# Altium PCB hic v1.0.0.PcbDoc (part 1 of 2)
Units mm, origin at the board's own origin, x right, y up, seen from the top; angles counter-clockwise.
Board outline 54.61 x 86.36 mm, 4 copper layers (Top Layer, GND, PWR, Bottom Layer); 173 components, 96 nets, 602 pads, 171 vias.
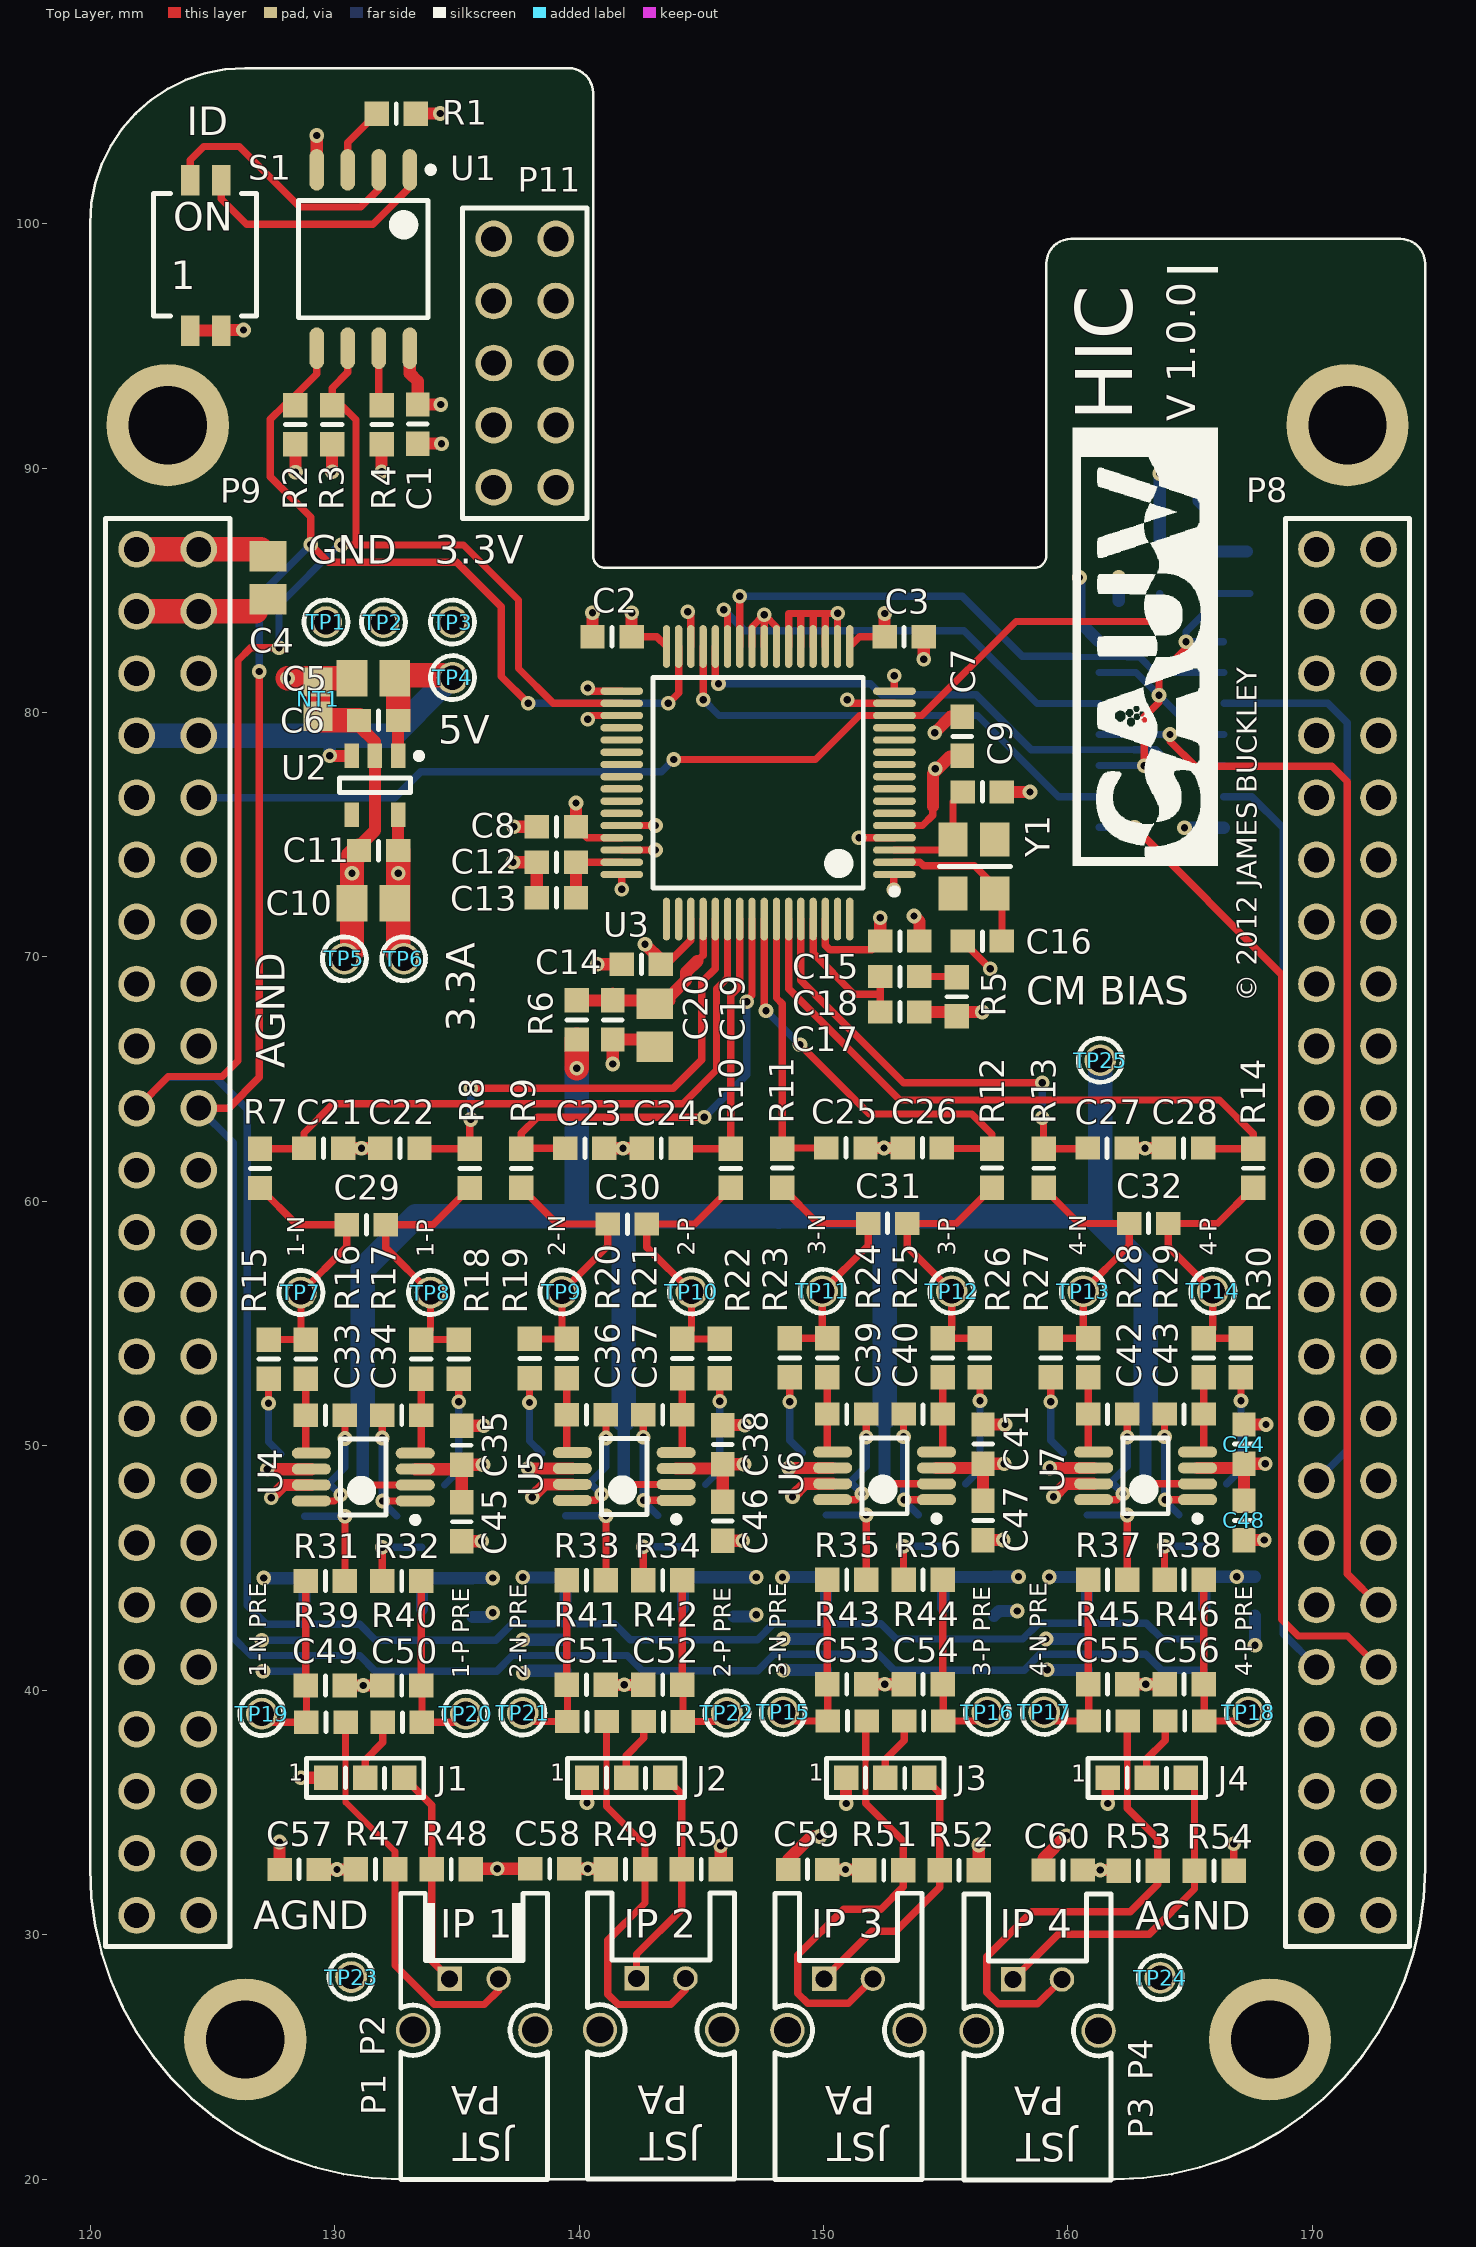
[diagram p0: Top Layer view]
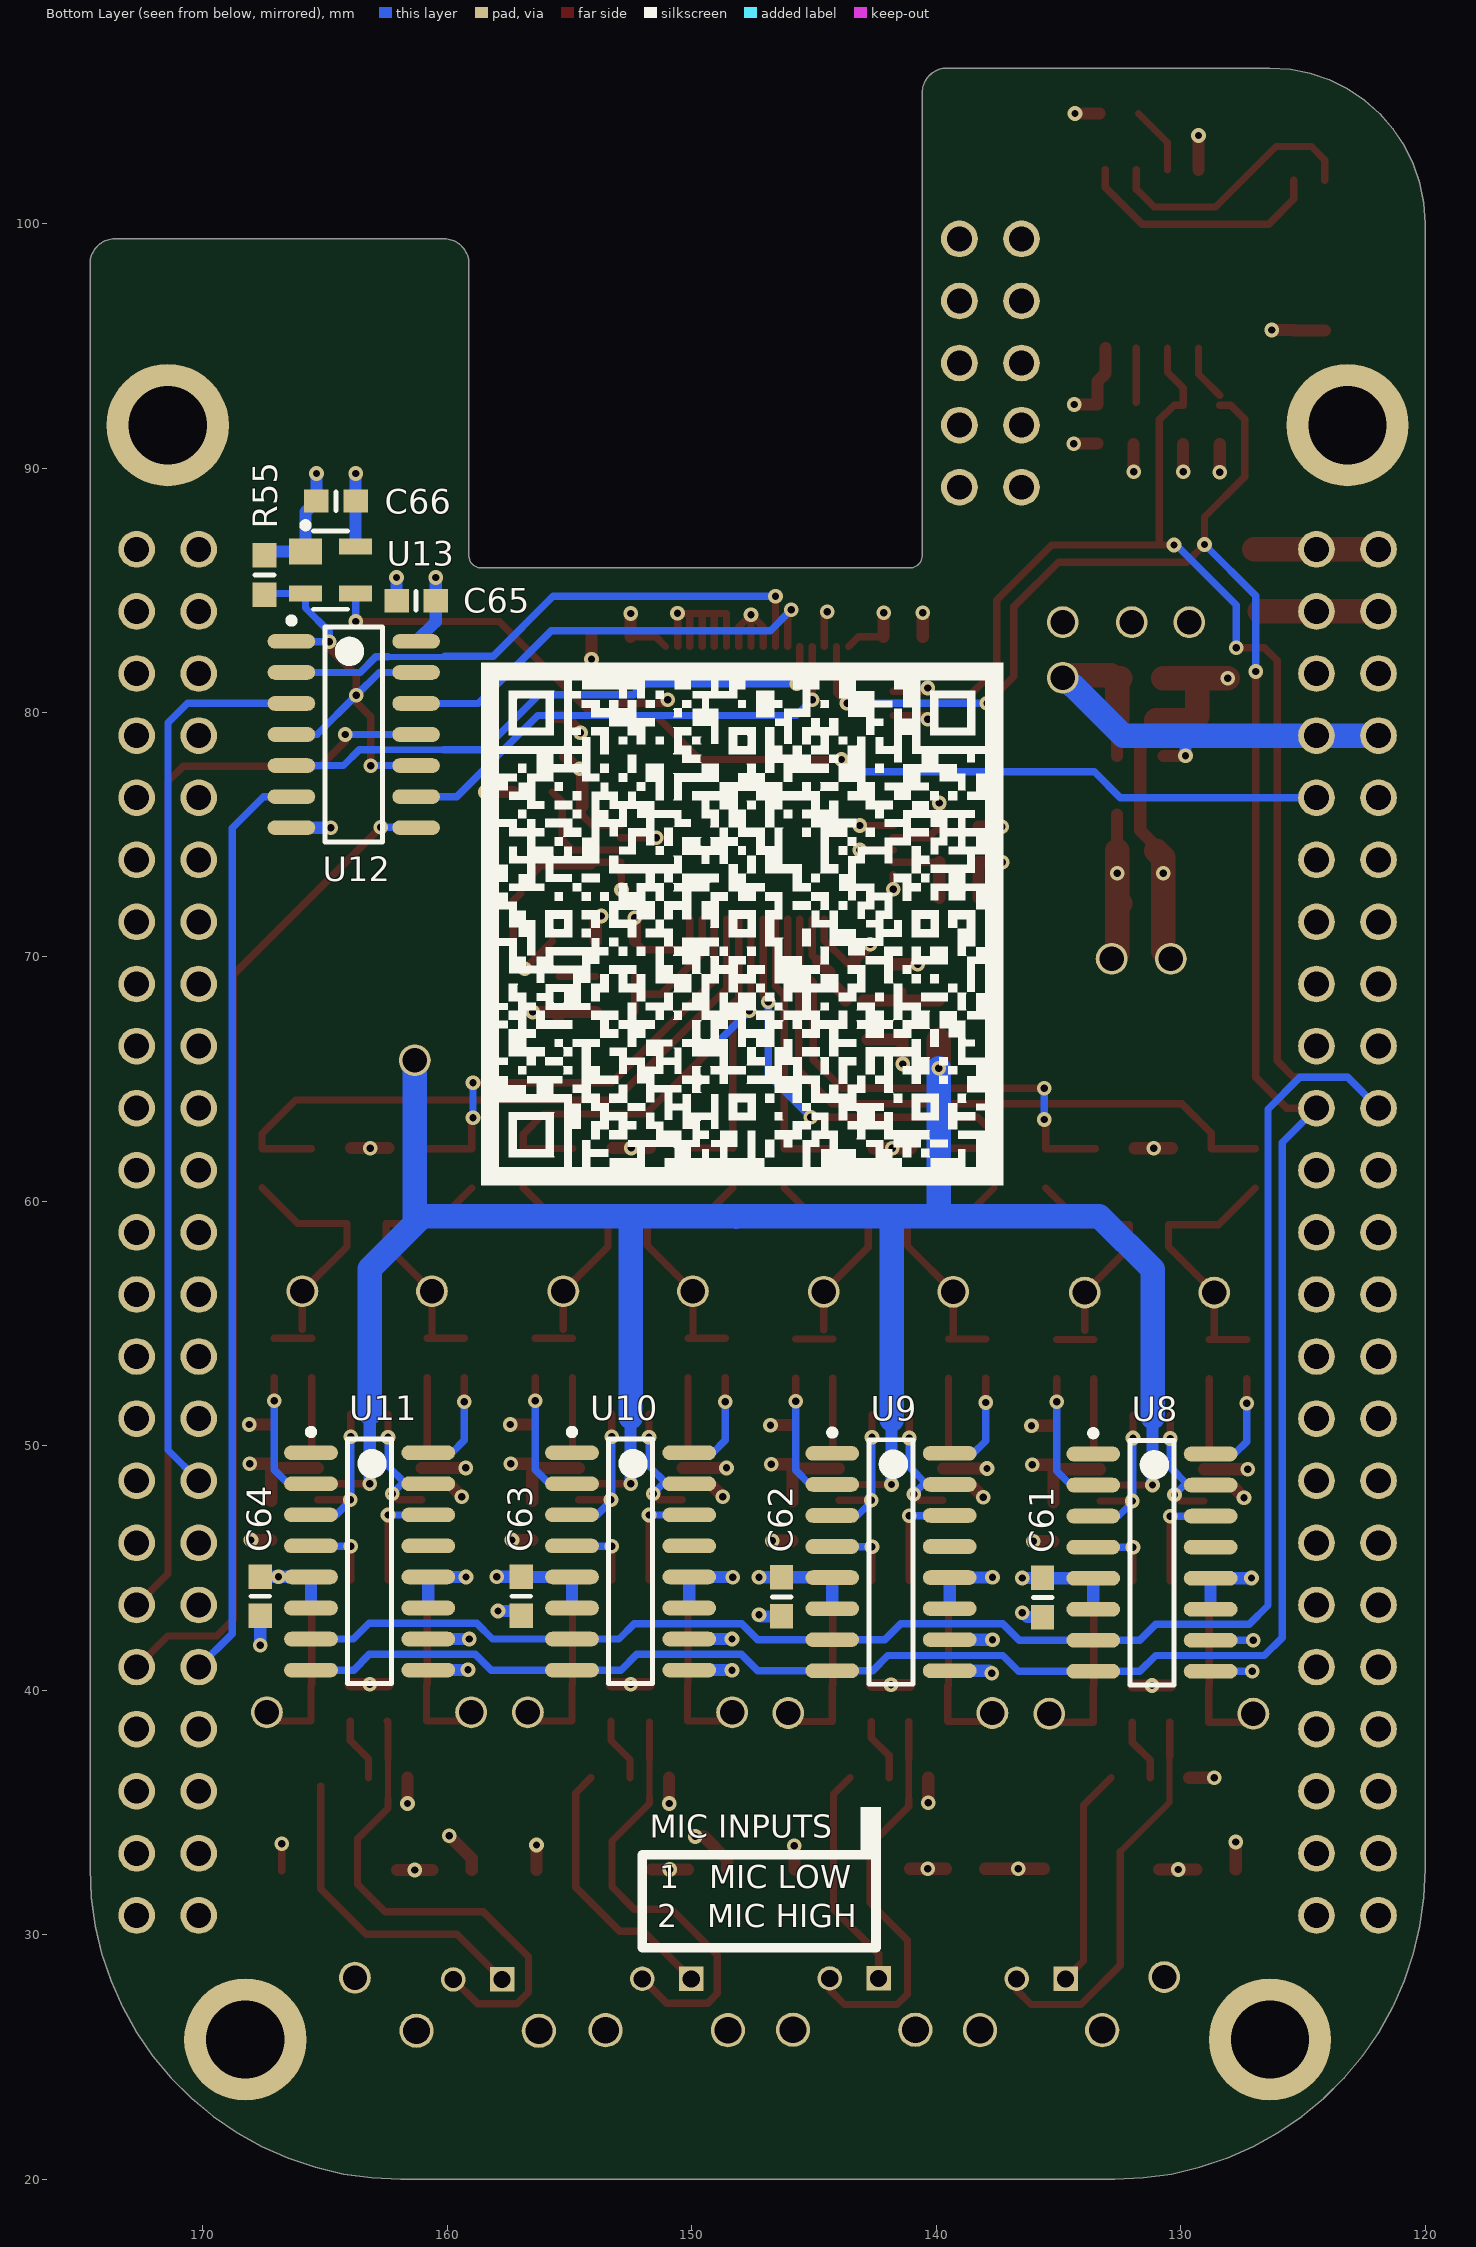
[diagram p1: Bottom Layer view, seen from below]
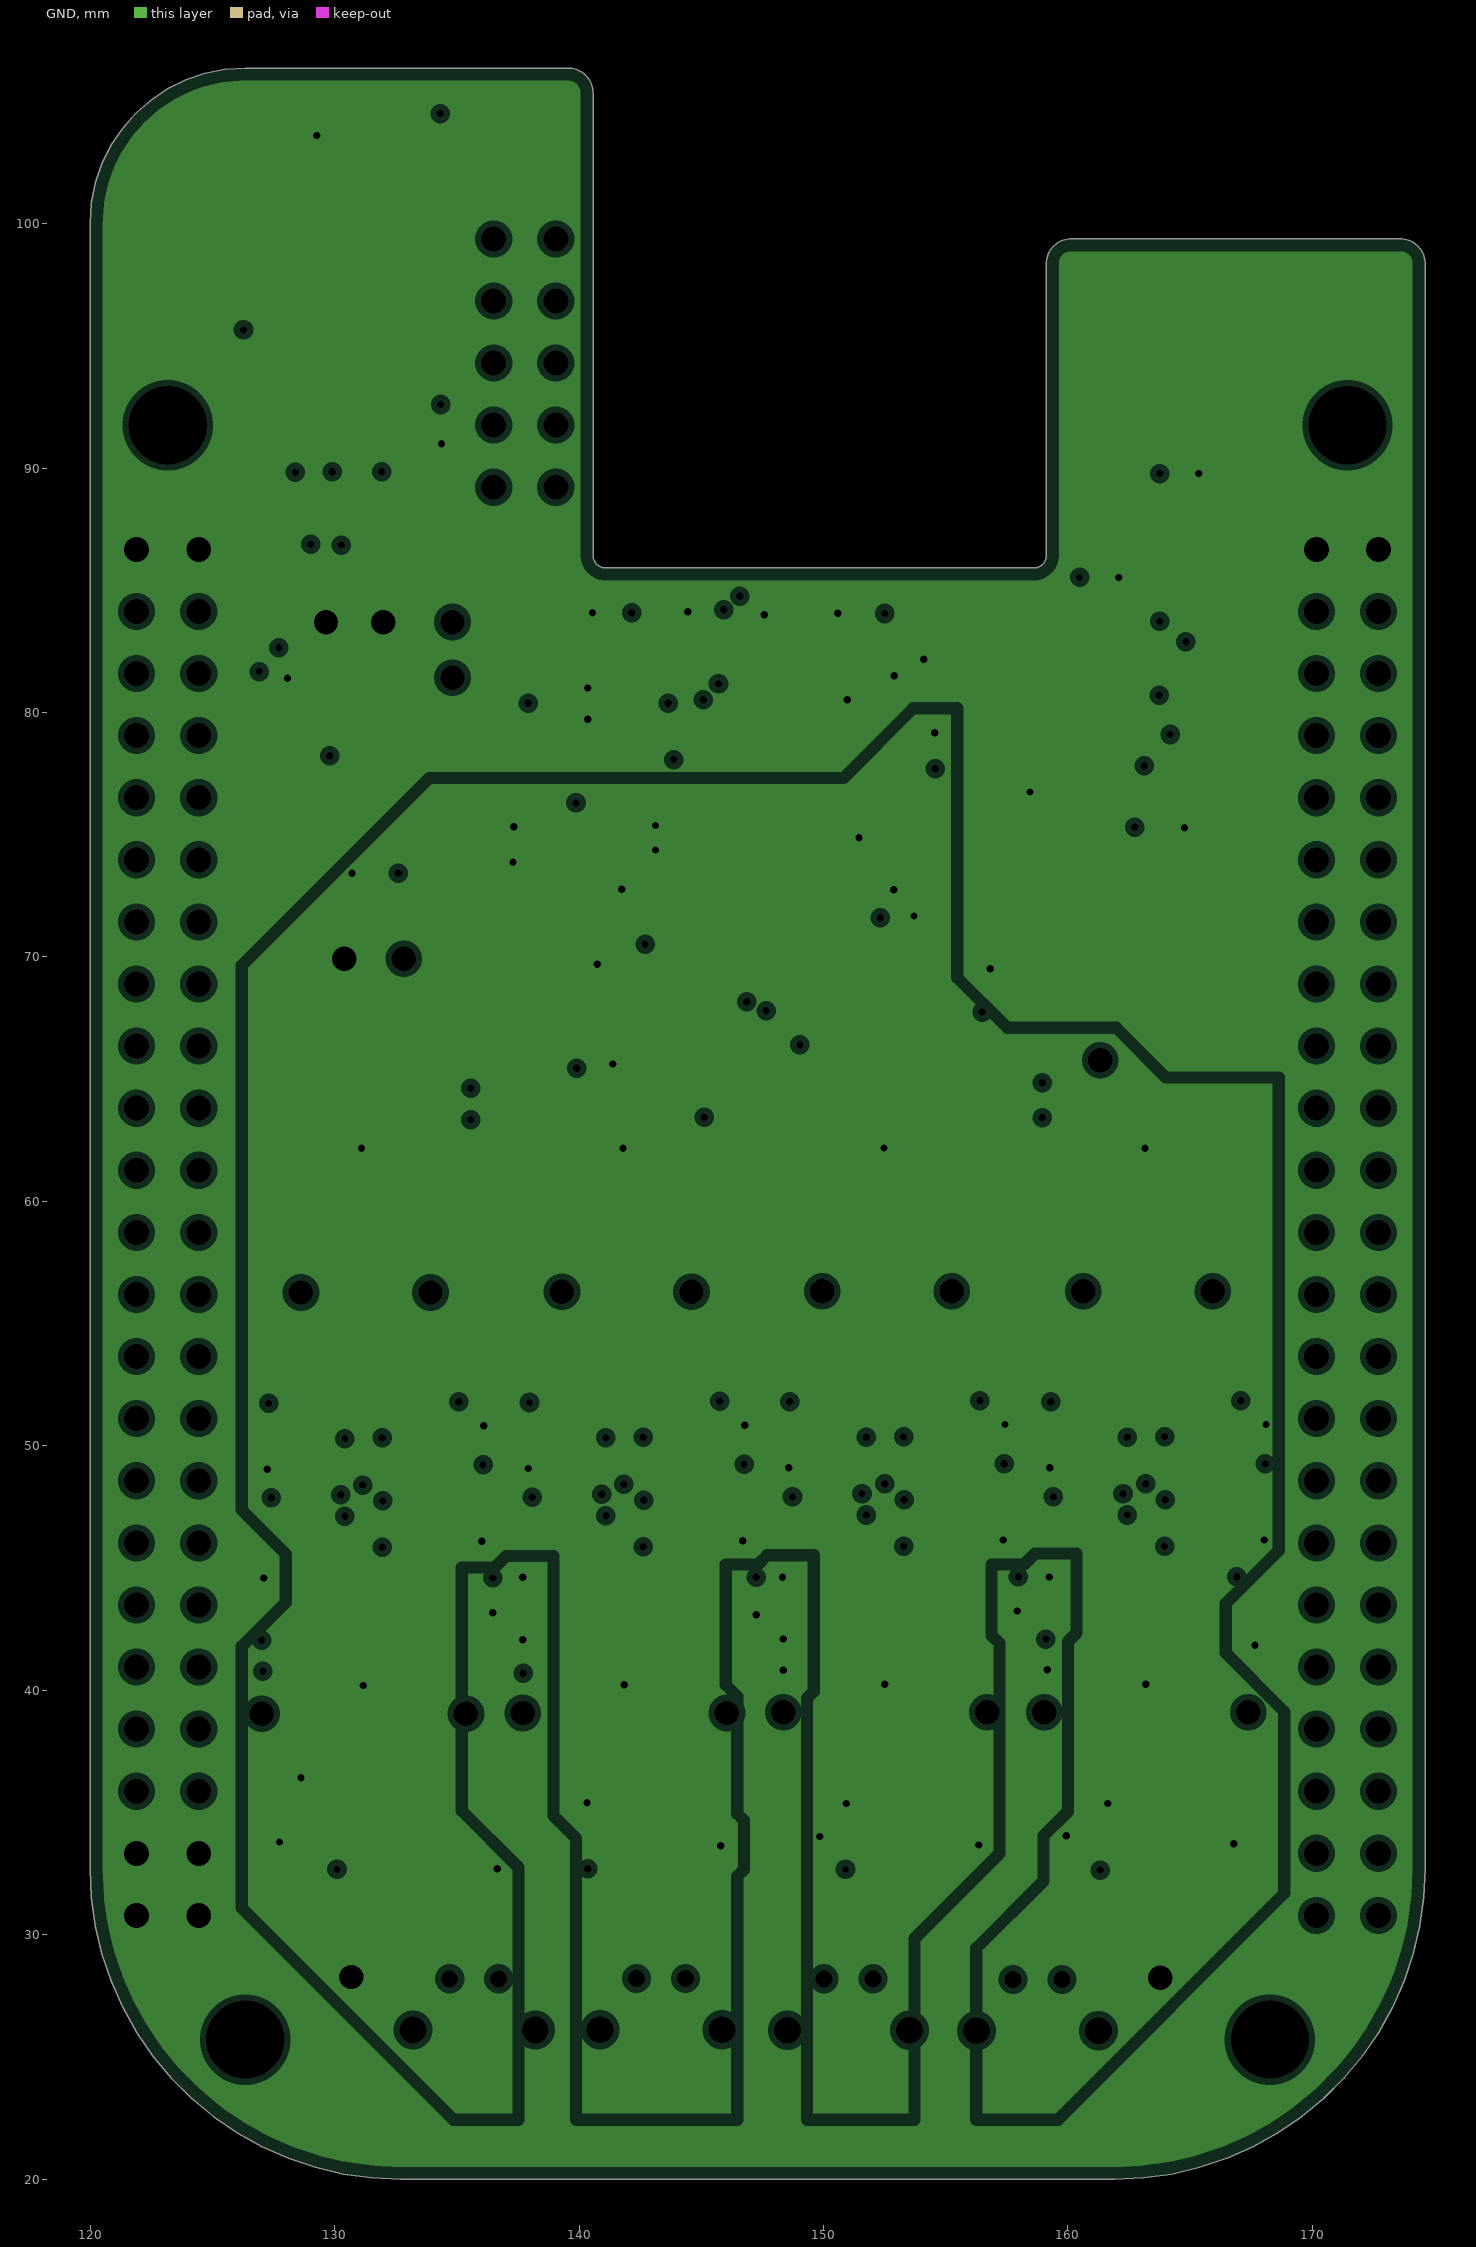
[diagram p2: GND, clearances drawn from the general rule]
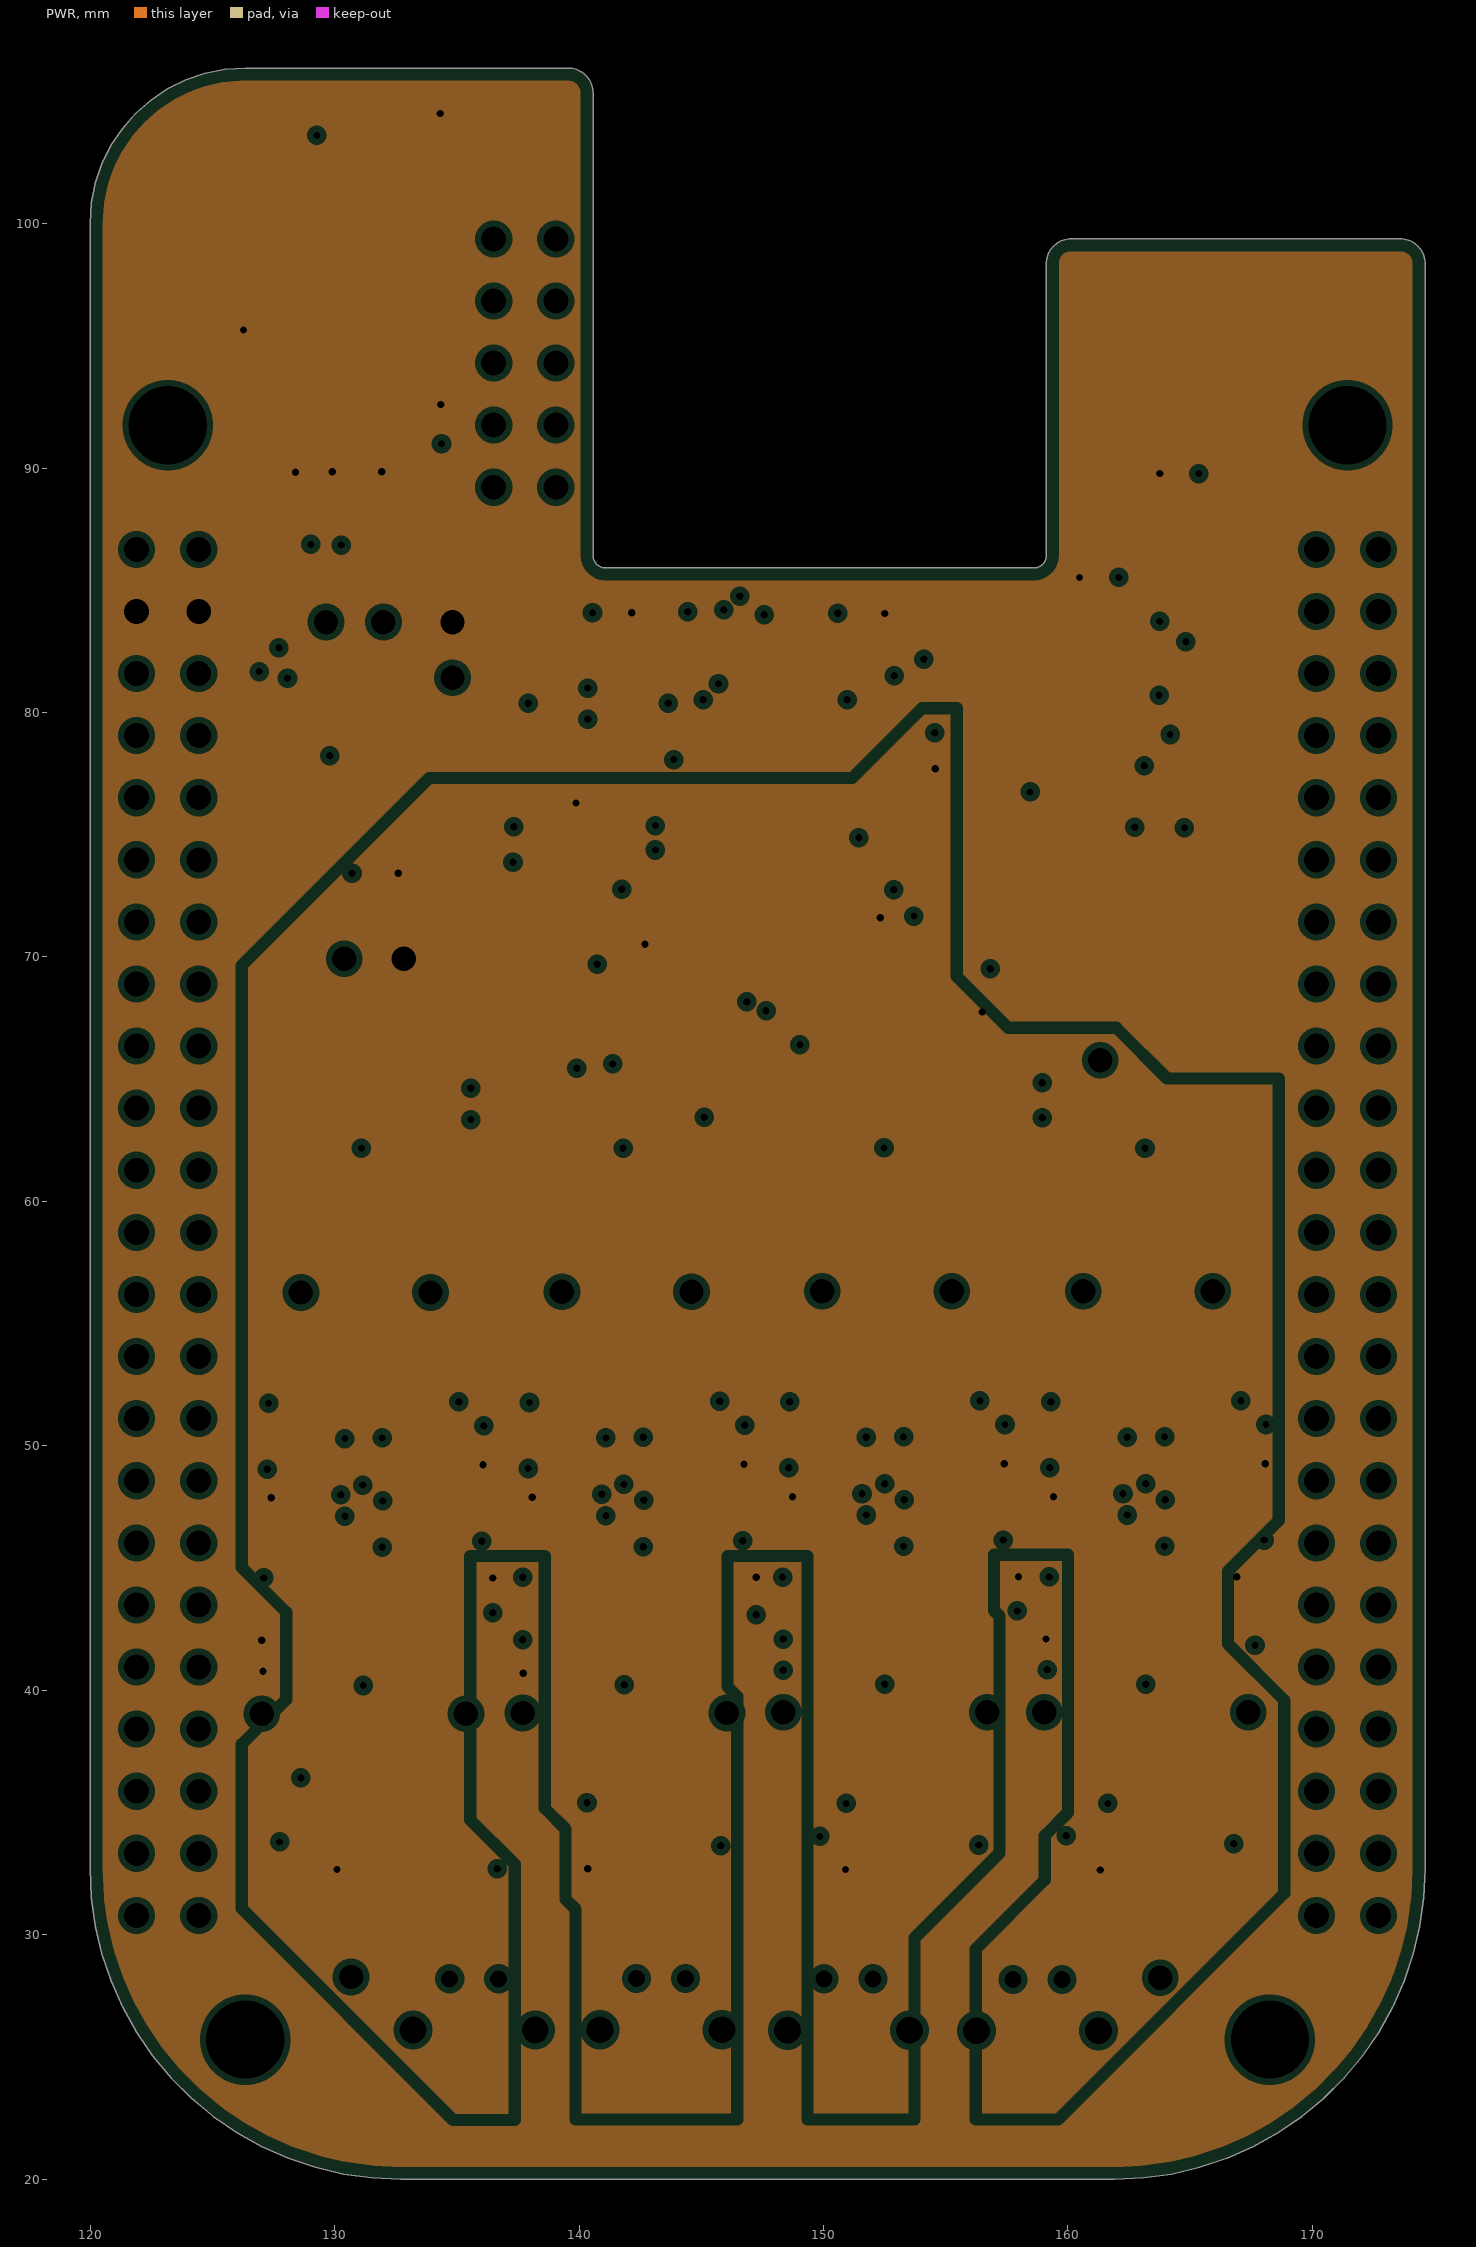
[diagram p3: PWR, clearances drawn from the general rule]

## Layer stack, top to bottom
Top Layer: signal copper 0.0356
Dielectric: core 0.32, FR-4, Dk 4.8
GND: plane copper 0.0356, net (Multiple Nets)
Dielectric: prepreg 0.32, FR-4, Dk 4.8
PWR: plane copper 0.0356, net (Multiple Nets)
Dielectric: core 0.32, FR-4, Dk 4.8
Bottom Layer: signal copper 0.0356

## Board outline
121.331,27.039 121.902,26.014 122.565,25.047 123.315,24.144 124.144,23.315 125.047,22.565 126.014,21.902 127.039,21.331 128.112,20.858 129.224,20.485 130.366,20.216 131.528,20.054 132.7,20 161.91,20 163.082,20.054 164.244,20.216 165.385,20.485 166.498,20.858 167.571,21.331 168.596,21.902 169.563,22.565 170.466,23.315 171.295,24.144 172.045,25.047 172.708,26.014 173.279,27.039 173.752,28.112 174.125,29.224 174.394,30.366 174.556,31.528 174.61,32.7 174.61,98.359 ccw(c173.594,98.359) 173.594,99.375 160.132,99.375 ccw(c160.132,98.359) 159.116,98.359 159.116,86.421 cw(c158.608,86.421) 158.608,85.913 141.082,85.913 cw(c141.082,86.421) 140.574,86.421 140.574,105.344 ccw(c139.558,105.344) 139.558,106.36 126.35,106.36 125.521,106.306 124.706,106.144 123.92,105.877 123.175,105.509 122.484,105.048 121.86,104.5 121.312,103.876 120.851,103.185 120.483,102.44 120.216,101.653 120.054,100.839 120,100.01 120,32.7 120.054,31.528 120.216,30.366 120.485,29.224 120.858,28.112

## Design rules (kind name [scope] priority, off if disabled: settings)
Clearance [All] p1: gap=0.15
ComponentClearance [All] p1: gap=0.25 collisioncheckmode=3 verticalgap=0.25 showdistances=FALSE
DiffPairsRouting [All] p1: maxlimit=0.3 minlimit=0.2 mostfreqgap=0.26 maxuncoupledlength=12.7
HoleSize [All] p1: absolutevalues=TRUE maxlimit=10 minlimit=0.2 maxpercent=80.000 minpercent=20.000
HoleToHoleClearance [All] p1: gap=0.25 allowstackedmicrovias=TRUE
MinimumAnnularRing [All] p1: minimumring=0.15
MinimumSolderMaskSliver [All] p1: minsoldermaskwidth=0.125
PlaneClearance [All] p1: clearance=0.25
PlaneConnect [All] p1: planeconnectstyle=Relief reliefexpansion=0.5 reliefentries=4 reliefconductorwidth=0.25 reliefairgap=0.25
PolygonConnect [All] p1: connectstyle=Relief reliefconductorwidth=0.25 reliefentries=4 polygonreliefangle="90 Angle"
RoomDefinition U_preamp4 [InComponentClass('U_preamp4')] p1: confinementstyle=ConfineIn formatcopy=TRUE lockcomponents=FALSE outline 147.1,34.85 158,34.85 158,60.125 147.1,60.125
RoomDefinition U_preamp3 [InComponentClass('U_preamp3')] p2: confinementstyle=ConfineIn formatcopy=TRUE lockcomponents=FALSE outline 157.775,34.85 168.675,34.85 168.675,60.125 157.775,60.125
RoomDefinition U_preamp2 [InComponentClass('U_preamp2')] p3: confinementstyle=ConfineIn formatcopy=TRUE lockcomponents=FALSE outline 136.45,34.825 147.35,34.825 147.35,60.1 136.45,60.1
RoomDefinition "U_adc filter4" [InComponentClass('U_adc filter4')] p4: confinementstyle=ConfineIn formatcopy=TRUE lockcomponents=FALSE outline 157.95,59.5 168.65,59.5 168.65,63.225 157.95,63.225
RoomDefinition "U_adc filter3" [InComponentClass('U_adc filter3')] p5: confinementstyle=ConfineIn formatcopy=TRUE lockcomponents=FALSE outline 147.25,59.5 157.95,59.5 157.95,63.225 147.25,63.225
RoomDefinition "U_adc filter2" [InComponentClass('U_adc filter2')] p6: confinementstyle=ConfineIn formatcopy=TRUE lockcomponents=FALSE outline 136.575,59.5 147.275,59.5 147.275,63.225 136.575,63.225
RoomDefinition "U_adc filter1" [InComponentClass('U_adc filter1')] p7: confinementstyle=ConfineIn formatcopy=TRUE lockcomponents=FALSE outline 125.875,59.475 136.6,59.475 136.6,63.2 125.875,63.2
RoomDefinition U_preamp1 [InComponentClass('U_preamp1')] p8: confinementstyle=ConfineIn formatcopy=TRUE lockcomponents=FALSE outline 125.775,34.8 136.675,34.8 136.675,60.075 125.775,60.075
RoutingVias [All] p1: holewidth=0.3 width=0.6 viastyle="Through Hole" minholewidth=0.3 minwidth=0.6 maxholewidth=0.4 maxwidth=0.8
SilkToSilkClearance [All] p1: silktosilkclearance=0.25
SilkscreenOverComponentPads [All] p1: minsilkscreentomaskgap=0.125
SolderMaskExpansion ViaCovering [(IsVia)] p1: expansion=-10
SolderMaskExpansion [All] p2: expansion=0.125
Width Power [InNetClass('Power')] p1: maxlimit=10 minlimit=0.25 preferedwidth=0.5
Width General [All] p2: maxlimit=10 minlimit=0.2 preferedwidth=0.3
19 further rules are at their usual default settings.

## Classes and differential pairs
component class U_buffer: C65 C66 P12 R55 U12 U13
channel class preamp: U_preamp1 U_preamp2 U_preamp3 U_preamp4
channel class "mic input": "U_mic input1" "U_mic input2" "U_mic input3" "U_mic input4"
channel class "adc filter": "U_adc filter1" "U_adc filter2" "U_adc filter3" "U_adc filter4"
net class Power: +3.3 +3.3A +5 AGND GND
component class U_preamp4: C31 C39 C40 C41 C47 C53 C54 C63 J3 R23 R24 R25 R26 R35 R36 R43 R44 TP11 TP12 TP15 TP16 U6 U10
component class U_preamp3: C32 C42 C43 C44 C48 C55 C56 C64 J4 R27 R28 R29 R30 R37 R38 R45 R46 TP13 TP14 TP17 TP18 U7 U11
component class U_preamp2: C30 C36 C37 C38 C46 C51 C52 C62 J2 R19 R20 R21 R22 R33 R34 R41 R42 TP9 TP10 TP21 TP22 U5 U9
component class U_preamp1: C29 C33 C34 C35 C45 C49 C50 C61 J1 R15 R16 R17 R18 R31 R32 R39 R40 TP7 TP8 TP19 TP20 U4 U8
component class U_power: C4 C5 C6 C10 C11 NT1 TP1 TP2 TP3 TP4 TP5 TP6 TP23 TP24 U2
component class "U_mic input4": C60 P4 R53 R54
component class "U_mic input3": C59 P3 R51 R52
component class "U_mic input2": C58 P2 R49 R50
component class "U_mic input1": C57 P1 R47 R48
component class "U_i2c pullups": R2 R3
component class U_eeprom: C1 R1 R4 S1 U1
component class U_codec: C2 C3 C7 C8 C9 C12 C13 C14 C15 C16 C17 C18 C19 C20 R5 R6 TP25 U3 Y1
component class "U_bb header": P8 P9 P11
component class "U_adc filter4": C27 C28 R13 R14
component class "U_adc filter3": C25 C26 R11 R12
component class "U_adc filter2": C23 C24 R9 R10
component class "U_adc filter1": C21 C22 R7 R8

## Components (designator, comment, footprint, x,y, rotation, side; value= is the part's Value field where it differs from the comment)
C1 "Cap" C0603 133.4,91.8 r90 top (schematic designator C27)
C2 "Cap" C0603 141.35,83.1 r0 top (schematic designator C7)
C3 "Cap" C0603 153.3,83.1 r180 top (schematic designator C8)
C4 "Cap Pol1" C0805 127.275,85.525 r90 top (schematic designator C6)
C5 "Cap Pol1" C0805 131.575,81.4 r180 top (schematic designator C7)
C6 "Cap" C0603 131.8,79.675 r0 top (schematic designator C28)
C7 "Cap" C0603 155.675,79.025 r270 top (schematic designator C10)
C8 "Cap" C0603 139.075,75.325 r0 top (schematic designator C12)
C9 "Cap" C0603 156.5,76.75 r180 top (schematic designator C3)
C10 "Cap Pol1" C0805 131.575,72.2 r180 top (schematic designator C5)
C11 "Cap" C0603 131.8,74.35 r0 top (schematic designator C29)
C12 "Cap" C0603 139.075,73.875 r0 top (schematic designator C16)
C13 "Cap" C0603 139.075,72.425 r180 top (schematic designator C15)
C14 "Cap" C0603 142.55,69.7 r0 top (schematic designator C9)
C15 "Cap" C0603 153.125,70.65 r180 top (schematic designator C11)
C16 "Cap" C0603 156.5,70.65 r0 top (schematic designator C4)
C17 "Cap" C0603 153.125,67.75 r0 top (schematic designator C13)
C18 "Cap" C0603 153.125,69.2 r0 top (schematic designator C14)
C19 "Cap" C0805 143.1,67.225 r90 top (schematic designator C17)
C20 "Cap" C0603 141.375,67.425 r90 top (schematic designator C18)
C21 "Cap" C0603 129.55,62.175 r0 top (schematic designator C2)
C22 "Cap" C0603 132.675,62.175 r0 top (schematic designator C1)
C23 "Cap" C0603 140.236,62.177 r0 top (schematic designator C2)
C24 "Cap" C0603 143.361,62.177 r0 top (schematic designator C1)
C25 "Cap" C0603 150.918,62.189 r0 top (schematic designator C2)
C26 "Cap" C0603 154.043,62.189 r0 top (schematic designator C1)
C27 "Cap" C0603 161.601,62.182 r0 top (schematic designator C2)
C28 "Cap" C0603 164.726,62.182 r0 top (schematic designator C1)
C29 "Cap" C0603 131.3,59.05 r0 top (schematic designator C24)
C30 "Cap" C0603 141.975,59.075 r0 top (schematic designator C24)
C31 "Cap" C0603 152.625,59.1 r0 top (schematic designator C24)
C32 "Cap" C0603 163.3,59.1 r0 top (schematic designator C24)
C33 "Cap" C0603 129.625,51.25 r0 top (schematic designator C22)
C34 "Cap" C0603 132.75,51.25 r180 top (schematic designator C26)
C35 "Cap" C0603 135.2,50.025 r270 top (schematic designator C20)
C36 "Cap" C0603 140.3,51.275 r0 top (schematic designator C22)
C37 "Cap" C0603 143.425,51.275 r180 top (schematic designator C26)
C38 "Cap" C0603 145.875,50.05 r270 top (schematic designator C20)
C39 "Cap" C0603 150.95,51.3 r0 top (schematic designator C22)
C40 "Cap" C0603 154.075,51.3 r180 top (schematic designator C26)
C41 "Cap" C0603 156.525,50.075 r270 top (schematic designator C20)
C42 "Cap" C0603 161.625,51.3 r0 top (schematic designator C22)
C43 "Cap" C0603 164.75,51.3 r180 top (schematic designator C26)
C44 "Cap" C0603 167.2,50.075 r270 top (schematic designator C20)
C45 "Cap" C0603 135.2,46.9 r90 top (schematic designator C19)
C46 "Cap" C0603 145.875,46.925 r90 top (schematic designator C19)
C47 "Cap" C0603 156.525,46.95 r90 top (schematic designator C19)
C48 "Cap" C0603 167.2,46.95 r90 top (schematic designator C19)
C49 "Cap" C0603 129.65,38.7 r0 top (schematic designator C23)
C50 "Cap" C0603 132.775,38.7 r180 top (schematic designator C30)
C51 "Cap" C0603 140.325,38.725 r0 top (schematic designator C23)
C52 "Cap" C0603 143.45,38.725 r180 top (schematic designator C30)
C53 "Cap" C0603 150.975,38.75 r0 top (schematic designator C23)
C54 "Cap" C0603 154.1,38.75 r180 top (schematic designator C30)
C55 "Cap" C0603 161.65,38.75 r0 top (schematic designator C23)
C56 "Cap" C0603 164.775,38.75 r180 top (schematic designator C30)
C57 "Cap" C0603 128.55,32.675 r0 top (schematic designator C1)
C58 "Cap" C0603 138.8,32.7 r0 top (schematic designator C1)
C59 "Cap" C0603 149.35,32.675 r0 top (schematic designator C1)
C60 "Cap" C0603 159.8,32.65 r0 top (schematic designator C1)
C61 "Cap" C0603 135.65,43.8 r90 bottom (schematic designator C21)
C62 "Cap" C0603 146.325,43.825 r90 bottom (schematic designator C21)
C63 "Cap" C0603 156.975,43.85 r90 bottom (schematic designator C21)
C64 "Cap" C0603 167.65,43.85 r90 bottom (schematic designator C21)
C65 "Cap" C0603 161.275,84.575 r180 bottom (schematic designator C25)
C66 "Cap" C0603 164.55,88.65 r180 bottom (schematic designator C31)
J1 "Header 3" 0603_JUMPER 130.45,36.425 r0 top (schematic designator P2)
J2 "Header 3" 0603_JUMPER 141.125,36.425 r0 top (schematic designator P2)
J3 "Header 3" 0603_JUMPER 151.725,36.425 r0 top (schematic designator P2)
J4 "Header 3" 0603_JUMPER 162.425,36.425 r0 top (schematic designator P2)
NT1 "NT" NetTie 129.325,81.05 r270 top net-tie
P1 "Header 2" S02B-PASK-2 138.709,28.2 r180 top
P2 "Header 2" S02B-PASK-2 146.354,28.218 r180 top (schematic designator P1)
P3 "Header 2" S02B-PASK-2 154.022,28.2 r180 top (schematic designator P1)
P4 "Header 2" S02B-PASK-2 161.755,28.176 r180 top (schematic designator P1)
P8 "Header 23X2" TSW-123-07-T-D_DOWN 170.165,86.675 r270 top
P9 "Header 23X2" TSW-123-07-T-D_DOWN 121.905,86.675 r270 top
P11 "Header 5X2" TSW-105-07-T-D_DOWN 139.05,89.215 r90 top (schematic designator P3)
R1 "Res2" R0603 132.525,104.5 r0 top (schematic designator R15)
R2 "Res2" R0603 128.4,91.775 r270 top (schematic designator R6)
R3 "Res2" R0603 129.9,91.775 r270 top (schematic designator R7)
R4 "Res2" R0603 131.925,91.775 r270 top (schematic designator R16)
R5 "Res2" R0603 155.45,68.375 r270 top
R6 "Res2" R0603 139.9,67.425 r270 top (schematic designator R4)
R7 "Res2" R0603 126.95,61.35 r90 top (schematic designator R2)
R8 "Res2" R0603 135.525,61.35 r90 top (schematic designator R1)
R9 "Res2" R0603 137.636,61.352 r90 top (schematic designator R2)
R10 "Res2" R0603 146.211,61.352 r90 top (schematic designator R1)
R11 "Res2" R0603 148.318,61.364 r90 top (schematic designator R2)
R12 "Res2" R0603 156.893,61.364 r90 top (schematic designator R1)
R13 "Res2" R0603 159.001,61.357 r90 top (schematic designator R2)
R14 "Res2" R0603 167.576,61.357 r90 top (schematic designator R1)
R15 "Res2" R0603 127.3,53.55 r90 top (schematic designator R8)
R16 "Res2" R0603 128.825,53.55 r90 top (schematic designator R10)
R17 "Res2" R0603 133.55,53.55 r90 top (schematic designator R12)
R18 "Res2" R0603 135.075,53.55 r90 top (schematic designator R14)
R19 "Res2" R0603 137.975,53.575 r90 top (schematic designator R8)
R20 "Res2" R0603 139.5,53.575 r90 top (schematic designator R10)
R21 "Res2" R0603 144.225,53.575 r90 top (schematic designator R12)
R22 "Res2" R0603 145.75,53.575 r90 top (schematic designator R14)
R23 "Res2" R0603 148.625,53.6 r90 top (schematic designator R8)
R24 "Res2" R0603 150.15,53.6 r90 top (schematic designator R10)
R25 "Res2" R0603 154.875,53.6 r90 top (schematic designator R12)
R26 "Res2" R0603 156.4,53.6 r90 top (schematic designator R14)
R27 "Res2" R0603 159.3,53.6 r90 top (schematic designator R8)
R28 "Res2" R0603 160.825,53.6 r90 top (schematic designator R10)
R29 "Res2" R0603 165.55,53.6 r90 top (schematic designator R12)
R30 "Res2" R0603 167.075,53.6 r90 top (schematic designator R14)
R31 "Res2" R0603 129.625,44.475 r0 top (schematic designator R9)
R32 "Res2" R0603 132.75,44.475 r180 top (schematic designator R11)
R33 "Res2" R0603 140.3,44.5 r0 top (schematic designator R9)
R34 "Res2" R0603 143.425,44.5 r180 top (schematic designator R11)
R35 "Res2" R0603 150.95,44.525 r0 top (schematic designator R9)
R36 "Res2" R0603 154.075,44.525 r180 top (schematic designator R11)
R37 "Res2" R0603 161.625,44.525 r0 top (schematic designator R9)
R38 "Res2" R0603 164.75,44.525 r180 top (schematic designator R11)
R39 "Res2" R0603 129.625,40.2 r180 top (schematic designator R13)
R40 "Res2" R0603 132.75,40.2 r0 top (schematic designator R15)
R41 "Res2" R0603 140.3,40.225 r180 top (schematic designator R13)
R42 "Res2" R0603 143.425,40.225 r0 top (schematic designator R15)
R43 "Res2" R0603 150.95,40.25 r180 top (schematic designator R13)
R44 "Res2" R0603 154.075,40.25 r0 top (schematic designator R15)
R45 "Res2" R0603 161.625,40.25 r180 top (schematic designator R13)
R46 "Res2" R0603 164.75,40.25 r0 top (schematic designator R15)
R47 "Res2" R0603 131.675,32.675 r180 top (schematic designator R2)
R48 "Res2" R0603 134.775,32.675 r180 top (schematic designator R3)
R49 "Res2" R0603 141.9,32.675 r180 top (schematic designator R2)
R50 "Res2" R0603 145,32.675 r180 top (schematic designator R3)
R51 "Res2" R0603 152.462,32.649 r180 top (schematic designator R2)
R52 "Res2" R0603 155.55,32.65 r180 top (schematic designator R3)
R53 "Res2" R0603 162.875,32.625 r180 top (schematic designator R2)
R54 "Res2" R0603 165.975,32.625 r180 top (schematic designator R3)
R55 "Res2" R0603 167.475,85.625 r270 bottom (schematic designator R17)
S1 "SW DIP-2" MCDHN-02F-V 124.1,95.625 r0 top (schematic designator S2)
TP1 "TESTPOINT" TESTPOINT 129.65,83.7 r180 top (schematic designator TP7)
TP2 "TESTPOINT" TESTPOINT 132,83.7 r180 top (schematic designator TP6)
TP3 "TESTPOINT" TESTPOINT 134.825,83.7 r180 top (schematic designator TP9)
TP4 "TESTPOINT" TESTPOINT 134.825,81.425 r180 top (schematic designator TP8)
TP5 "TESTPOINT" TESTPOINT 130.4,69.925 r180 top
TP6 "TESTPOINT" TESTPOINT 132.825,69.925 r180 top (schematic designator TP10)
TP7 "TESTPOINT" TESTPOINT 128.625,56.275 r180 top (schematic designator TP13)
TP8 "TESTPOINT" TESTPOINT 133.925,56.275 r180 top (schematic designator TP14)
TP9 "TESTPOINT" TESTPOINT 139.3,56.3 r180 top (schematic designator TP13)
TP10 "TESTPOINT" TESTPOINT 144.6,56.3 r180 top (schematic designator TP14)
TP11 "TESTPOINT" TESTPOINT 149.95,56.325 r180 top (schematic designator TP13)
TP12 "TESTPOINT" TESTPOINT 155.25,56.325 r180 top (schematic designator TP14)
TP13 "TESTPOINT" TESTPOINT 160.625,56.325 r180 top
TP14 "TESTPOINT" TESTPOINT 165.925,56.325 r180 top
TP15 "TESTPOINT" TESTPOINT 148.35,39.1 r180 top (schematic designator TP12)
TP16 "TESTPOINT" TESTPOINT 156.7,39.1 r180 top (schematic designator TP11)
TP17 "TESTPOINT" TESTPOINT 159.025,39.1 r180 top (schematic designator TP12)
TP18 "TESTPOINT" TESTPOINT 167.375,39.1 r180 top (schematic designator TP11)
TP19 "TESTPOINT" TESTPOINT 127.025,39.05 r180 top (schematic designator TP12)
TP20 "TESTPOINT" TESTPOINT 135.375,39.05 r180 top (schematic designator TP11)
TP21 "TESTPOINT" TESTPOINT 137.7,39.075 r180 top (schematic designator TP12)
TP22 "TESTPOINT" TESTPOINT 146.05,39.075 r180 top (schematic designator TP11)
TP23 "TESTPOINT" TESTPOINT 130.675,28.275 r180 top (schematic designator TP4)
TP24 "TESTPOINT" TESTPOINT 163.775,28.25 r180 top (schematic designator TP3)
TP25 "TESTPOINT" TESTPOINT 161.325,65.775 r180 top (schematic designator TP1)
U1 "CAT24C256" CAT24C256-SOIC 131.175,98.55 r270 top (schematic designator U4)
U2 "ADP121" ADP121 131.65,77.025 r270 top (schematic designator U5)
U3 "AD1937" AD1937 147.325,77.125 r180 top (schematic designator U1)
U4 "THS4521" THS4521 131.175,48.725 r180 top (schematic designator U3)
U5 "THS4521" THS4521 141.85,48.75 r180 top (schematic designator U3)
U6 "THS4521" THS4521 152.5,48.775 r180 top (schematic designator U3)
U7 "THS4521" THS4521 163.175,48.775 r180 top (schematic designator U3)
U8 "AD5242" AD5242 131.175,45.225 r180 bottom (schematic designator U2)
U9 "AD5242" AD5242 141.85,45.25 r180 bottom (schematic designator U2)
U10 "AD5242" AD5242 152.5,45.275 r180 bottom (schematic designator U2)
U11 "AD5242" AD5242 163.175,45.275 r180 bottom (schematic designator U2)
U12 "74LVC126AD" 74LVC126AD_SOIC 163.825,79.1 r180 bottom (schematic designator U6)
U13 "STM811" STM811 164.775,85.825 r180 bottom (schematic designator U7)
Y1 "XTAL" ABM8G-12.288MHZ-18-D2Y-T 156.15,73.7 r270 top

## Footprints (in the part's own frame and the unit in brackets; to place one, negate y for a bottom-side part, rotate by r counter-clockwise, add the part's x,y. Pads: shape width x height; smd on the part's side, far side on the other; paste and mask are expansions set on the pad)
74LVC126AD_SOIC [mm] "NXP - 74LVC126AD - IC, LOGIC, 74LVC, BUFFER, SO14"
  oval 1.95x0.6 smd: 1(-2.55,3.81) 2(-2.55,2.54) 3(-2.55,1.27) 4(-2.55,0) 5(-2.55,-1.27) 6(-2.55,-2.54) 7(-2.55,-3.81) 8(2.55,-3.81) 9(2.55,-2.54) 10(2.55,-1.27) 11(2.55,0) 12(2.55,1.27) 13(2.55,2.54) 14(2.55,3.81)
  silkscreen extent -2.68,-4.4 1.17,4.78, body extent -2,-4.38 2,4.38, height 1.75
0603_JUMPER [mm]
  rect 1x1 smd: 1(-0.8,0) 2(0.8,0) 3(2.4,0)
  silkscreen extent -1.6,-0.8 3.2,0.8, body extent -0.85,-0.48 0.85,0.47, height 0.45
ABM8G-12.288MHZ-18-D2Y-T [mm] "ABRACON - ABM8G-12.288MHZ-18-D2Y-T - CRYSTAL, 12.288MHZ, 18PF, SMD"
  rect 1.4x1.2 smd: 1(-1.1,-0.85) 2(1.1,0.85) ""(-1.1,0.85) ""(1.1,-0.85)
  silkscreen extent 0,-1.4 0,1.5, body extent -1.6,-1.25 1.6,1.25, height 1
AD1937 [mm] "Four ADCs/Eight DACs with PLL,  192 kHz, 24-Bit Codec"
  oval 1.75x0.3 smd: 1(-5.575,3.75) 2(-5.575,3.25) 3(-5.575,2.75) 4(-5.575,2.25) 5(-5.575,1.75) 6(-5.575,1.25) 7(-5.575,0.75) 8(-5.575,0.25) 9(-5.575,-0.25) 10(-5.575,-0.75) 11(-5.575,-1.25) 12(-5.575,-1.75) 13(-5.575,-2.25) 14(-5.575,-2.75) 15(-5.575,-3.25) 16(-5.575,-3.75) 33(5.575,-3.75) 34(5.575,-3.25) 35(5.575,-2.75) 36(5.575,-2.25) 37(5.575,-1.75) 38(5.575,-1.25) 39(5.575,-0.75) 40(5.575,-0.25) 41(5.575,0.25) 42(5.575,0.75) 43(5.575,1.25) 44(5.575,1.75) 45(5.575,2.25) 46(5.575,2.75) 47(5.575,3.25) 48(5.575,3.75)
  oval 0.3x1.75 smd: 17(-3.75,-5.575) 18(-3.25,-5.575) 19(-2.75,-5.575) 20(-2.25,-5.575) 21(-1.75,-5.575) 22(-1.25,-5.575) 23(-0.75,-5.575) 24(-0.25,-5.575) 25(0.25,-5.575) 26(0.75,-5.575) 27(1.25,-5.575) 28(1.75,-5.575) 29(2.25,-5.575) 30(2.75,-5.575) 31(3.25,-5.575) 32(3.75,-5.575) 49(3.75,5.575) 50(3.25,5.575) 51(2.75,5.575) 52(2.25,5.575) 53(1.75,5.575) 54(1.25,5.575) 55(0.75,5.575) 56(0.25,5.575) 57(-0.25,5.575) 58(-0.75,5.575) 59(-1.25,5.575) 60(-1.75,5.575) 61(-2.25,5.575) 62(-2.75,5.575) 63(-3.25,5.575) 64(-3.75,5.575)
  silkscreen extent -5.7,-4.3 4.3,4.57, body extent -5,-5 5,5, height 1.6
AD5242 [mm]
  oval 2.2x0.6 smd: 1(-2.4,4.445) 2(-2.4,3.175) 3(-2.4,1.905) 4(-2.4,0.635) 5(-2.4,-0.635) 6(-2.4,-1.905) 7(-2.4,-3.175) 8(-2.4,-4.445) 9(2.4,-4.445) 10(2.4,-3.175) 11(2.4,-1.905) 12(2.4,-0.635) 13(2.4,0.635) 14(2.4,1.905) 15(2.4,3.175) 16(2.4,4.445)
  silkscreen extent -2.53,-5 0.9,5.42, body extent -2,-5 2,5, height 1.75
ADP121 [mm] "ANALOG DEVICES - ADP121-AUJZ33R7 - LDO, 150MA, 3.3V, TSOT-23-5"
  rect 1x0.6 smd mask+0.13: 1(-1.2,0.95) 3(-1.2,-0.95)
  rect 1x0.6 smd mask+0.22: 2(-1.2,0)
  rect 1x0.6 smd: 4(1.2,-0.95) 5(1.2,0.95)
  silkscreen extent -1.32,-1.45 0.3,1.93, body extent -0.8,-1.45 0.8,1.45, height 0.9
C0603 [mm] "Chip Capacitor, 2-Leads, Body 1.6x0.8mm, IPC Medium Density"
  rect 1x0.95 smd: 1(-0.8,0) 2(0.8,0)
  silkscreen extent 0,-0.38 0,0.38, body extent -0.88,-0.48 0.87,0.48, height 0.8
C0805 [mm] "KEMET - C0805C104K5RACTU - CAPACITOR, 0805, 100NF, 50V, X7R"
  rect 1.25x1.5 smd: 1(-0.889,0) 2(0.861,0)
  body extent -1.12,-0.72 1.09,0.72, height 1
CAT24C256-SOIC [mm] "CAT24C256 256 kb I2  C CMOS Serial  EEPROM"
  oval 1.7x0.6 smd: 1(-3.65,1.905) 2(-3.65,0.635) 3(-3.65,-0.635) 4(-3.65,-1.905) 5(3.65,-1.905) 6(3.65,-0.635) 7(3.65,0.635) 8(3.65,1.905)
  silkscreen extent -3.77,-2.65 2.4,2.88, body extent -2.69,-2.67 2.69,2.67, height 2.03
MCDHN-02F-V [mm] "MULTICOMP - MCDHN-02F-V - SWITCH, DIP, SMD, 2 WAY"
  rect 0.76x1.25 smd: 1(0,0) 2(1.27,0) 3(1.27,6.15) 4(0,6.15)
  silkscreen extent -1.5,0.6 2.7,5.6, body extent -1.3,0.83 2.47,5.33, height 1.5
NetTie [mm] "Net Tie"
  rect 1.2x1.2 smd: 1(-0.2,0) 2(1.2,0)
  Top Layer lines w1: 1.2,0 -0.2,0
R0603 [mm]
  rect 1x1 smd: 1(-0.8,0) 2(0.8,0)
  silkscreen extent 0,-0.4 0,0.4, body extent -0.85,-0.48 0.85,0.47, height 0.45
S02B-PASK-2 [mm] "JST (JAPAN SOLDERLESS TERMINALS) - S02B-PASK-2 - HEADER, PA, 3WAY, SIDE, 2MM"
  rect 1x1 hole 0.7: 1(4,0)
  round 1 hole 0.7: 2(2,0)
  round 1.4 hole 1.1: ""(0.5,2.1) ""(5.5,2.1)
  silkscreen extent 0,-3.5 6,8.2, body extent 0,-3.5 6,8.2, height 6.5
STM811 [mm] "SOT143, 4-Leads, Body 3.0x2.6mm (max), Pitch 1.92mm, IPC Medium Density"
  rect 1.35x1.05 smd: 1(-1.025,0.76)
  rect 1.35x0.65 smd: 2(-1.025,-0.96) 3(1.025,-0.96) 4(1.025,0.96)
  silkscreen extent -1.15,-1.6 0.7,1.96, body extent -0.7,-1.52 0.7,1.52, height 1.12
TESTPOINT [mm] "VERO - 20-2137 - TERMINAL, PCB, BLACK, PK100"
  round 1.3 hole 1: 1(0,0)
  silkscreen extent -0.9,-0.9 0.9,0.9, body extent -1,-1 1,1, height 3.39
THS4521 [mm]
  oval 1.6x0.45 smd: 1(-2.125,0.975) 2(-2.125,0.325) 3(-2.125,-0.325) 4(-2.125,-0.975) 5(2.125,-0.975) 6(2.125,-0.325) 7(2.125,0.325) 8(2.125,0.975)
  silkscreen extent -2.25,-1.55 0.92,1.87, body extent -1.55,-1.55 1.55,1.55, height 1.1
TSW-105-07-T-D_DOWN [mm] "SAMTEC - TSW-105-T-D - HEADER, 2.54MM, THT VERT, 10WAY"
  round 1.5 hole 1.02: 1(0,0) 2(0,2.54) 3(2.54,0) 4(2.54,2.54) 5(5.08,0) 6(5.08,2.54) 7(7.62,0) 8(7.62,2.54) 9(10.16,0) 10(10.16,2.54)
  silkscreen extent -1.27,-1.27 11.43,3.81, body extent -1.27,-1.27 11.43,3.81, height 2.08
TSW-123-07-T-D_DOWN [mm] "SAMTEC - TSW-123-07-T-D - HEADER, 2.54MM, THT VERT, 46WAY"
  round 1.5 hole 1.02: 1(0,0) 2(0,2.54) 3(2.54,0) 4(2.54,2.54) 5(5.08,0) 6(5.08,2.54) 7(7.62,0) 8(7.62,2.54) 9(10.16,0) 10(10.16,2.54) 11(12.7,0) 12(12.7,2.54) 13(15.24,0) 14(15.24,2.54) 15(17.78,0) 16(17.78,2.54) 17(20.32,0) 18(20.32,2.54) 19(22.86,0) 20(22.86,2.54) 21(25.4,0) 22(25.4,2.54) 23(27.94,0) 24(27.94,2.54) 25(30.48,0) 26(30.48,2.54) 27(33.02,0) 28(33.02,2.54) 29(35.56,0) 30(35.56,2.54) 31(38.1,0) 32(38.1,2.54) 33(40.64,0) 34(40.64,2.54) 35(43.18,0) 36(43.18,2.54) 37(45.72,0) 38(45.72,2.54) 39(48.26,0) 40(48.26,2.54) 41(50.8,0) 42(50.8,2.54) 43(53.34,0) 44(53.34,2.54) 45(55.88,0) 46(55.88,2.54)
  silkscreen extent -1.27,-1.27 57.15,3.81, body extent -1.27,-1.27 57.15,3.81, height 2.08

## Part data
C1 C2 C3 C6 C7 C8 C9 C11 C12 C13 C14 C15 C16 C17 C18 C19 C20 C21 C22 C23 C24 C25 C26 C27 C28 C29 C30 C31 C32 C33 C34 C35 C36 C37 C38 C39 C40 C41 C42 C43 C44 C45 C46 C47 C48 C49 C50 C51 C52 C53 C54 C55 C56 C57 C58 C59 C60 C61 C62 C63 C64 C65 C66: "Capacitor"
C4 C5 C10: "Polarized Capacitor (Radial)"
J1 J2 J3 J4: "Header, 3-Pin"
NT1: "NET TIE"
P1 P2 P3 P4: "Header, 2-Pin"
P8 P9: "Header, 23-Pin, Dual row"
P11: "Header, 5-Pin, Dual row"
R1 R2 R3 R4 R5 R6 R7 R8 R9 R10 R11 R12 R13 R14 R15 R16 R17 R18 R19 R20 R21 R22 R23 R24 R25 R26 R27 R28 R29 R30 R31 R32 R33 R34 R35 R36 R37 R38 R39 R40 R41 R42 R43 R44 R45 R46 R47 R48 R49 R50 R51 R52 R53 R54 R55: "Resistor"
S1: "DIP Switch, 2 Position, SPST"
TP1 TP2 TP3 TP4 TP5 TP6 TP7 TP8 TP9 TP10 TP11 TP12 TP13 TP14 TP15 TP16 TP17 TP18 TP19 TP20 TP21 TP22 TP23 TP24 TP25: "TEST POINT"
U1: "CAT24C256 256 kb I2  C CMOS Serial  EEPROM"
U2: "ANALOG DEVICES - ADP121-AUJZ33R7 - LDO, 150MA, 3.3V, TSOT-23-5"
U8 U9 U10 U11: "AD5242, 10K"
U12: "NXP - 74LVC126AD - IC, LOGIC, 74LVC, BUFFER, SO14"
U13: "STMICROELECTRONICS - STM811TW16F - MPU LOW RESET 3.08V, SOT-143-4, 811"
Y1: "Crystal Oscillator"

## Free pads (board coordinates)
  round 5 hole 3.2: 1(123.175,91.755) 1(126.35,25.715) 1(168.26,25.715) 1(171.435,91.755)

## Via types
v1: diameter 0.6, hole 0.3, Top Layer to Bottom Layer, 168 vias
v2: diameter 0.6, hole 0.3, Top Layer to Bottom Layer, tented both sides, 3 vias

## Nets (pads, with @x,y where several pads share a name; then routed paths per layer and width w, separated by ;. In a path a pad name is that pad's centre, name@x,y a point inside that pad or via, vN(x,y) a via of type N, cw(c..) or ccw(c..) an arc to the next point about the centre after c; other vN are vias at no path point)
+3.3: C1.2 C2.2 C3.2 C4.1 C61.2 C62.2 C63.2 C64.2 C65.2 C66.2 P9.3 P9.4 R1.2 R2.2 R3.2 R4.2 S1.1 S1.2 TP3.1 U1.8 U3.17 U3.32 U8.5 U8.6 U8.9 U8.10 U9.5 U9.6 U9.9 U10.5 U10.6 U11.5 U11.6 U11.10 U12.14 U13.4 | length 48.9
  Top Layer w0.3: C2.2@142.15,83.1 143.175,83.1 U3.32@143.575,82.7 ; U3.17@151.075,82.7 151.475,83.1 C3.2@152.5,83.1
  Top Layer w0.5: S1.1@124.1,95.625 S1.2@125.37,95.625 125.395,95.65 v1(126.275,95.65) ; v1(128.4,89.825) R2.2@128.4,90.975 ; v1(129.9,89.85) R3.2@129.9,90.975 ; v1(131.925,89.85) R4.2@131.925,90.975 ; U1.8@133.08,94.9 133.08,93.87 133.4,93.55 C1.2@133.4,92.6 v1(134.35,92.6) ; R1.2@133.325,104.5 v1(134.325,104.5) ; C2.2@142.15,83.1 v1(142.15,84.075) ; C3.2@152.5,83.1 v1(152.5,84.05)
  Top Layer w1: P9.3@121.905,84.135 P9.4@124.445,84.135 C4.1@126.774,84.135
  Bottom Layer w0.3: v1(127.025,42.05) U8.10@128.775,42.05 ; v1(127.07,40.78) U8.9@128.775,40.78
  Bottom Layer w0.5: U8.6@133.575,43.32 U8.5@133.575,44.59 C61.2@135.64,44.59 ; C61.2@135.65,44.6 v1(136.475,44.6) ; v1(137.725,40.7) 137.83,40.805 U9.9@139.45,40.805 ; U9.6@144.25,43.345 U9.5@144.25,44.615 144.26,44.625 C62.2@146.325,44.625 v1(147.25,44.625) ; U10.6@154.9,43.37 U10.5@154.9,44.64 C63.2@156.965,44.64 ; C63.2@156.975,44.65 v1(157.975,44.65) ; v1(159.1,42.1) U11.10@160.775,42.1 ; v1(160.475,85.525) 160.475,83.71 U12.14@161.275,82.91 ; U13.4@163.75,86.785 C66.2@163.75,88.65 v1(163.75,89.775) ; U11.6@165.575,43.37 U11.5@165.575,44.64 165.585,44.65 C64.2@167.65,44.65
  other v1: 166.9,44.65
+3.3A: C7.2 C8.2 C10.1 C11.2 C14.2 C15.2 C17.2 C35.2 C38.2 C41.2 C44.2 C45.2 C46.2 C47.2 C48.2 C57.2 C58.2 C59.2 C60.2 R5.2 R47.2 R49.2 R51.2 R53.2 TP6.1 U2.5 U3.5 U3.45 U3.51 U3.62 U4.3 U4.7 U5.3 U5.7 U6.3 U6.7 U7.3 U7.7 | length 53.9
  Top Layer w0.3: C8.2@139.875,75.325 140.325,74.875 U3.45@141.75,74.875 ; C14.2@143.586,69.7 144.575,70.689 U3.51@144.575,71.55 ; U3.62@150.075,71.55 150.075,70.475 150.25,70.3 151.975,70.3 C15.2@152.325,70.65 ; U3.5@152.9,75.375 154.05,75.375 154.475,75.8 154.475,76.15
  Top Layer w0.5: v1(127.406,47.877) 127.406,47.881 127.925,48.4 U4.7@129.05,48.4 ; C57.2@129.35,32.675 R47.2@130.875,32.675 ; C11.2@132.6,74.35 U2.5@132.6,75.825 ; U4.3@133.3,49.05 C35.2@135.025,49.05 ; C45.2@135.2,47.7 135.2,48.452 C35.2@135.2,49.225 v1(136.075,49.225) ; v1(138.081,47.902) 138.081,47.906 138.6,48.425 U5.7@139.725,48.425 ; C58.2@139.6,32.7 R49.2@141.075,32.7 ; C8.2@139.875,75.325 v1(139.875,76.3) ; v1(142.7,70.525) 143.35,69.875 C14.2@143.35,69.7 ; U5.3@143.975,49.075 C38.2@145.7,49.075 ; C46.2@145.875,47.725 145.875,48.477 C38.2@145.875,49.25 v1(146.75,49.25) ; v1(148.731,47.927) 148.731,47.931 149.25,48.45 U6.7@150.375,48.45 ; C59.2@150.15,32.675 R51.2@151.637,32.675 ; C15.2@152.325,70.65 v1(152.325,71.6) ; C17.2@153.925,67.75 R5.2@155.275,67.75 ; 154.475,76.15 154.475,77.5 155.175,78.2 ; U6.3@154.625,49.1 C41.2@156.35,49.1 ; R5.2@155.45,67.575 155.625,67.75 v1(156.5,67.75) ; C47.2@156.525,47.75 156.525,48.502 C41.2@156.525,49.275 v1(157.4,49.275) ; v1(159.406,47.927) 159.406,47.931 159.925,48.45 U7.7@161.05,48.45 ; C60.2@160.6,32.65 R53.2@162.05,32.65 ; U7.3@165.3,49.1 C44.2@167.025,49.1 ; C48.2@167.2,47.75 167.2,48.502 C44.2@167.2,49.275 v1(168.075,49.275)
  Top Layer w1: C10.1@132.464,72.2 C10.1@132.6,72.336 ; C11.2@132.6,74.35 v1(132.6,73.425) C10.1@132.6,72.336 ; TP6.1@132.825,69.925 132.6,70.15 C10.1@132.6,72.336
  other v1: 130.1,32.675 154.575,77.7
  other v2: 161.325,32.65 150.9,32.675 140.35,32.7
+5: C5.1 C6.2 P9.7 P9.8 TP4.1 U2.1 U2.3 | length 19.8
  Top Layer w0.5: v1(129.8,78.225) U2.3@130.7,78.225 ; U2.1@132.6,78.225 C6.2@132.6,79.675
  Top Layer w1: C5.1@132.464,81.4 132.6,81.264 C6.2@132.6,79.675 ; C5.1@132.861,81.525 TP4.1@134.4,81.525
  Bottom Layer w0.5: v1(129.8,78.225) 129.8,79.055
  Bottom Layer w1: P9.7@121.905,79.055 P9.8@124.445,79.055 129.8,79.055 132.355,79.055 134.387,81.088 TP4.1@134.4,81.075
AGND: C6.1 C7.1 C8.1 C10.2 C11.1 C12.1 C13.2 C14.1 C15.1 C19.1 C20.1 C21.2 C22.1 C23.2 C24.1 C25.2 C26.1 C27.2 C28.1 C35.1 C38.1 C41.1 C44.1 C45.1 C46.1 C47.1 C48.1 C57.1 C58.1 C59.1 C60.1 J1.1 J2.1 J3.1 J4.1 NT1.2 R39.1 R40.1 R41.1 R42.1 R43.1 R44.1 R45.1 R46.1 R48.1 R50.1 R52.1 R54.1 TP5.1 TP23.1 TP24.1 U2.2 U3.1 U3.4 U3.44 U3.46 U3.48 U4.6 U5.6 U6.6 U7.6 | length 67.6
  Top Layer w0.3: v1(141.75,72.775) U3.48@141.75,73.375 ; U3.46@141.75,74.375 v1(143.125,74.375) ; U3.44@141.75,75.375 v1(143.125,75.375) ; v1(151.45,74.875) U3.4@152.9,74.875 ; v1(152.875,72.75) 152.875,73.35 U3.1@152.9,73.375 ; R54.1@166.775,32.625 v1(166.775,33.725)
  Top Layer w0.5: v1(127.25,49.05) U4.6@129.05,49.05 ; C57.1@127.75,32.675 v1(127.75,33.8) ; v1(128.625,36.425) J1.1@129.65,36.425 ; C21.2@130.35,62.175 C22.1@131.875,62.175 ; R39.1@130.425,40.2 R40.1@131.95,40.2 ; C11.1@131,74.525 131.65,75.175 U2.2@131.65,78.225 131.65,78.8 C6.1@131,79.45 ; C45.1@135.2,46.1 v1(136.025,46.1) ; C35.1@135.2,50.825 v1(136.1,50.825) ; R48.1@135.6,32.7 C58.1@138,32.7 ; v1(137.3,73.875) C12.1@138.275,73.875 C13.2@138.275,72.425 ; v1(137.325,75.325) C8.1@138.275,75.325 ; v1(137.925,49.075) U5.6@139.725,49.075 ; v1(140.325,35.4) J2.1@140.325,36.425 ; v1(140.75,69.7) C14.1@141.75,69.7 ; C23.2@141.036,62.177 C24.1@142.561,62.177 ; R41.1@141.1,40.225 R42.1@142.625,40.225 ; v1(141.375,65.625) C20.1@141.375,66.625 C19.1@142.811,66.625 ; R50.1@145.8,32.675 v1(145.8,33.65) ; C46.1@145.875,46.125 v1(146.7,46.125) ; C38.1@145.875,50.85 v1(146.775,50.85) ; C59.1@148.55,32.675 148.55,33.075 149.5,34.025 v1(149.85,34.025) ; v1(148.575,49.1) U6.6@150.375,49.1 ; v1(150.925,35.375) J3.1@150.925,36.425 ; C25.2@151.718,62.189 C26.1@153.243,62.189 ; R43.1@151.75,40.25 R44.1@153.275,40.25 ; v1(153.7,71.675) 153.925,71.45 C15.1@153.925,70.65 ; v1(154.55,79.175) 155.2,79.825 C7.1@155.675,79.825 ; R52.1@156.35,32.65 v1(156.35,33.675) ; C47.1@156.525,46.15 v1(157.35,46.15) ; C41.1@156.525,50.875 v1(157.425,50.875) ; C60.1@159,32.65 159,33.125 v1(159.925,34.05) ; v1(159.25,49.1) U7.6@161.05,49.1 ; v1(161.625,35.375) J4.1@161.625,36.425 ; C27.2@162.401,62.182 C28.1@163.926,62.182 ; R45.1@162.425,40.25 R46.1@163.95,40.25 ; C48.1@167.2,46.15 v1(168.025,46.15) ; C44.1@167.2,50.875 v1(168.1,50.875)
  Top Layer w1: NT1.2@129.325,79.85 129.5,79.675 C6.1@131,79.675 ; TP5.1@130.4,69.925 130.714,70.239 130.714,74.064 C11.1@131,74.35
  other v1: 136.65,32.7 131.175,40.2 141.85,40.225 152.5,40.25 163.175,40.25 131.1,62.175 141.8,62.177 152.475,62.189 163.15,62.182 130.714,73.425
BUF_OE: R55.2 U12.1 U12.4 U12.10 U12.13 U13.2 | length 19.6
  Top Layer w0.3: v1(163.125,77.825) 163.125,79.825 163.725,80.425 v1(163.725,80.7) 163.725,81.525 164.825,82.625 v1(164.825,82.9)
  Bottom Layer w0.25: v1@163.12,77.83 v1(163.125,77.825) ; U12.1@166.365,82.91 U12.1@166.375,82.91
  Bottom Layer w0.3: U12.10@161.275,77.83 v1@163.12,77.83 ; U12.13@161.275,81.64 162.785,81.64 v1(163.725,80.7) 165.325,79.1 U12.4@166.375,79.1 ; v1@164.825,83.175 v1(164.825,82.9) ; U12.1@166.365,82.9 v1(164.825,82.9) ; R55.2@167.435,84.865 U13.2@165.8,84.865 165.8,84.275 164.825,83.3 v1(164.825,82.9)
CHAN1.N: C31.1 R11.1 R23.2 R24.2 TP11.1 | length 10.9
  Top Layer w0.3: R11.1@148.318,60.557 149.775,59.1 C31.1@151.825,59.1 151.825,58.2 TP11.1@149.95,56.325 R24.2@149.95,54.6 ; R23.2@148.625,54.4 R24.2@150.15,54.4
CHAN1.P: C31.2 R12.1 R25.2 R26.2 TP12.1 | length 10.7
  Top Layer w0.3: R25.2@154.875,54.4 R26.2@156.4,54.4 ; R25.2@155.25,54.775 TP12.1@155.25,56.325 153.425,58.15 C31.2@153.425,59.1 155.429,59.1 R12.1@156.893,60.564
CHAN2.N: C32.1 R13.1 R27.2 R28.2 TP13.1 | length 10.9
  Top Layer w0.3: R13.1@159.001,60.549 160.45,59.1 C32.1@162.5,59.1 162.5,58.2 TP13.1@160.625,56.325 R28.2@160.625,54.6 ; R27.2@159.3,54.4 R28.2@160.825,54.4
CHAN2.P: C32.2 R14.1 R29.2 R30.2 TP14.1 | length 10.7
  Top Layer w0.3: R29.2@165.55,54.4 R30.2@167.075,54.4 ; R29.2@165.925,54.775 TP14.1@165.925,56.325 164.1,58.15 C32.2@164.1,59.1 166.119,59.1 R14.1@167.576,60.557